# EAGLE board N2-mapleCUx_large_330-014 (EAGLE 7.6.0)
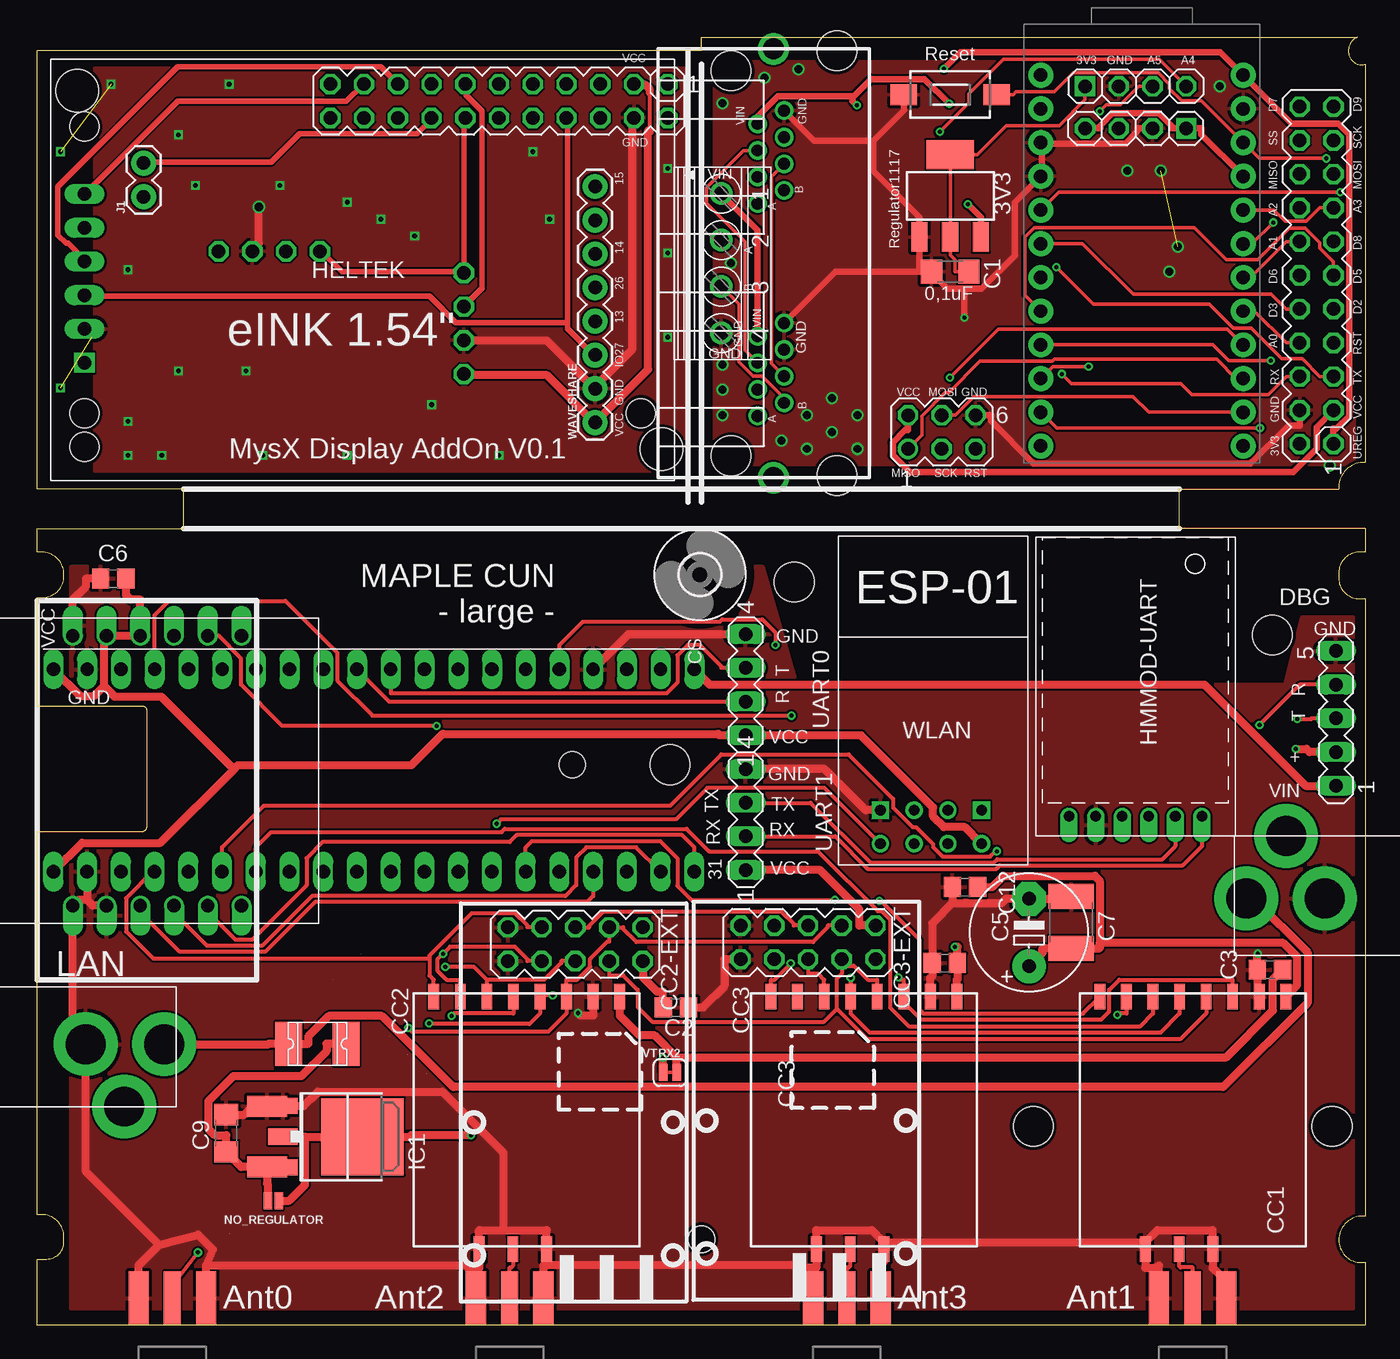
[diagram p0: board, top side]
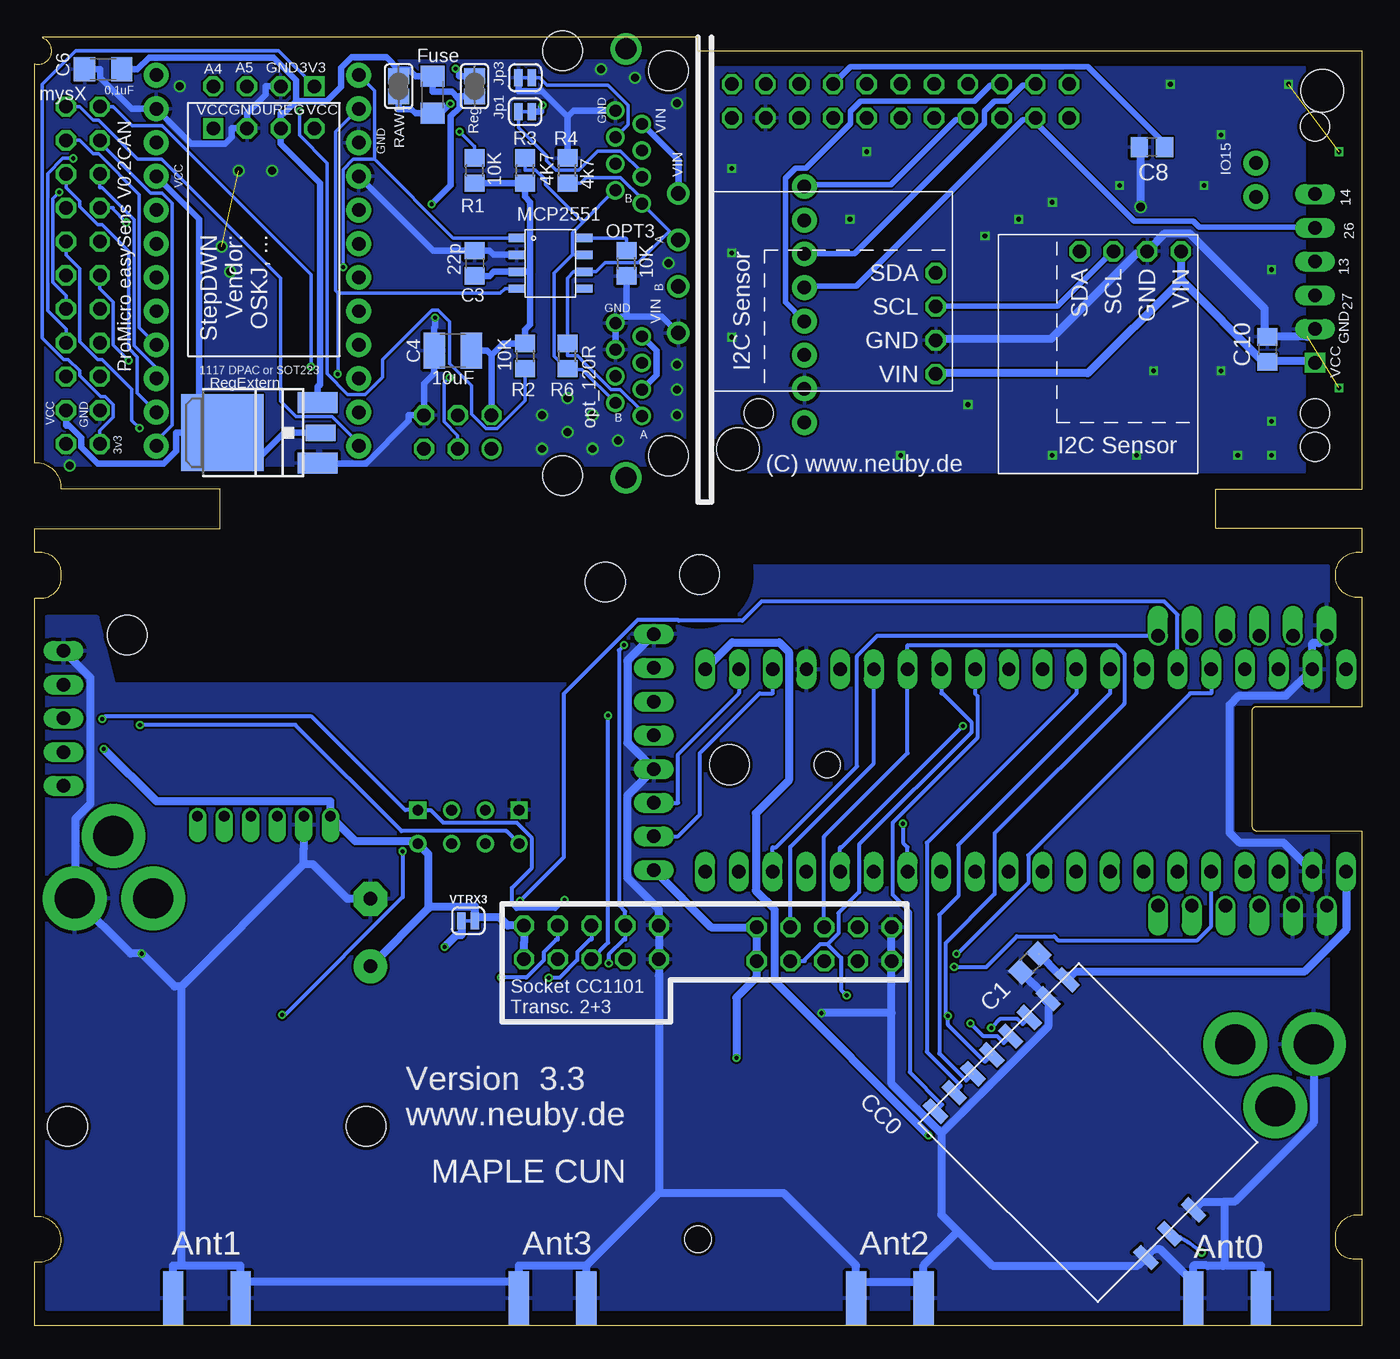
[diagram p1: board, bottom side, seen from below]

Size 100 x 97 mm. Coordinates in mm from the lower left corner, seen from the top.
Outline: 0,0 0,5 0.71,5 arc90 2,6.29 2,6.67 arc90 0.32,8.35 0,8.35 0,37.21 7.89,37.21 arc90 8.26,37.58 8.26,46.32 arc90 7.97,46.61 0,46.61 0,54.83 0.39,54.83 arc90 2,56.44 2,56.57 arc90 0.33,58.24 0,58.24 0,60 11,60 11,63 0,63 0,96 50,96 50,97 99.4,97 arc90 98.8,95.6 arc90 100,95 100,65 99.8,65 arc90 98,63 86,63 86,60 100,60 100,58.24 99.54,58.24 arc90 98,56.7 98,56.41 arc90 99.41,54.75 100,54.75 100,8.24 99.8,8.24 arc90 98,6.44 arc90 99.69,4.75 100,4.75 100,0 0,0
Copper layers (1*16): Top 0.035mm / dielectric 1.5mm / Bottom 0.035mm
Design rules "SeeedStudio_2layer_DRU_no_angle_20140221": minimum track width 6mil, minimum drill 12mil, track to track 6mil, track to pad 6mil, pad to pad 6mil, via to via 6mil, smd to smd 0mil, copper to edge 10mil, drill to drill 10mil, minimum pad ring 10mil, minimum via ring 6mil, stop-mask expansion 2mil, vias tented up to drill 100mil, thermal gap 10mil
Net classes: 0 default: width 0.305 mm; 1 Power: width 0.61 mm
Holes 2 mm at 50,6.5 40.28,42.23
Holes 3 mm at 47.65,42.23 93,52 57,56 75,15 97.5,15 60.2,64 60.2,96
Holes 3.2 mm at 47,66 3,93
tRestrict: area 0,37.3 to 9.4,46.5; area 0,95 to 50,96; area 0,63 to 1,95; area 100,63.5 to 100.5,96.5; area 61.9,63.2 to 94.9,63.7
bRestrict: area 0,37.3 to 9.4,46.5; area 0,95 to 50,96; area 0,63 to 1,95; area 100,63.5 to 100.5,96.5; area 62,63.2 to 95,63.7

## Footprints (pad centres in the part's own frame; a part is rotated, then mirrored left to right if it is on the bottom)
SPARKFUN_PRO_MICRO = drill 1.016 pad 1.88: 1 -7.62,12.7; 2 -7.62,10.16; 3 -7.62,7.62; 4 -7.62,5.08; 5 -7.62,2.54; 6 -7.62,0; 7 -7.62,-2.54; 8 -7.62,-5.08; 9 -7.62,-7.62; 10 -7.62,-10.16; 11 -7.62,-12.7; 12 -7.62,-15.24; 13 7.62,-15.24; 14 7.62,-12.7; 15 7.62,-10.16; 16 7.62,-7.62; 17 7.62,-5.08; 18 7.62,-2.54; 19 7.62,0; 20 7.62,2.54; 21 7.62,5.08; 22 7.62,7.62; 23 7.62,10.16; 24 7.62,12.7
C0805 = smd 1.3 x 1.5: 1 -0.95,0; 2 0.95,0
E5-8,5 = drill 1.016 pad 2.54: + -2.54,0 | drill 1.016 pad 2.54 octagon: - 2.54,0
C1812 = smd 1.9 x 3.4: 1 -1.95,0; 2 1.95,0
C1206 = smd 1.6 x 1.8: 1 -1.4,0; 2 1.4,0
C1210 = smd 1.6 x 2.7: 1 -1.4,0; 2 1.4,0
CC1101_MODULE1_SMD = smd 1.93 x 0.813: ANT 19,5.96; CSN 0,0; GDO0 0,2; GDO2 0,4; GND@0 0,12; GND@1 19,8.5; GND@2 19,3.42; MISO 0,6; MOSI 0,10; SCLK 0,8; VCC 0,14
CC1101_MODULE3_DIL = drill 1.016 octagon: CSN 1.81,6.1; GDO0 4.35,6.1; GDO2 4.35,8.64; GND@0 1.81,3.56; GND@1 4.35,3.56; MISO 1.81,8.64; MOSI 1.81,11.18; SCK 4.35,11.18; VCC@0 1.81,13.72; VCC@1 4.35,13.72
MA05-1 = drill 1.016 long: 1 -5.08,0; 2 -2.54,0; 3 0,0; 4 2.54,0; 5 5.08,0
1812L = smd 2.03 x 3.3: P$1 -2.16,0; P$2 2.16,0
1206 = smd 1.6 x 1.8: 1 -1.4,0; 2 1.4,0
DTSM-3 = smd 2 x 1.6: 1 -3.494,0; 2 3.494,0
3,0 = hole 3: 0,0
HELTEC_1.54INCH = drill 1.016 long: CLK 21.59,-7.62; CS 21.59,-5.08; D/C 21.59,0; GND 21.59,2.54; SDI 21.59,-2.54 | drill 1.016 square: VCC 21.59,5.08 | hole 2.2: 21.59,11.43; 21.59,8.89; 21.59,-12.7; -20.32,8.89
HM-MOD-UART-DIL = drill 0.8 offset: 1 0,12; 2 0,10; 3 0,8; 4 0,6; 5 0,4; 6 0,2
1X04-S = drill 1.016 square: 1 -3.81,0 | drill 1.016 octagon: 2 -1.27,0; 3 1.27,0; 4 3.81,0
DPACK = smd 1.6 x 3: 1 -2.28,-4.8; 3 2.28,-4.8 | smd 5.8 x 6.2: 4 0,2.38
USR-ES1 = drill 1 pad 1.35 offset: 1 -10.16,5.715; 2 -10.16,3.175; 3 -10.16,0.635; 4 -10.16,-1.905; 5 -10.16,-4.445; 6 -10.16,-6.985; 7 10.16,-6.985; 8 10.16,-4.445; 9 10.16,-1.905; 10 10.16,0.635; 11 10.16,3.175; 12 10.16,5.715
SOT223 = smd 1.219 x 2.235: 1 -2.311,-3.099; 2 0,-3.099; 3 2.311,-3.099 | smd 3.6 x 2.2: TAB 0,3.099
1X02 = drill 1.016 pad 1.88: 1 0,0; 2 2.54,0
RJ45_2X_S = drill 0.889: 1-1 -4.5,2; 1-2 -5.5,4; 1-3 -6.5,2; 1-4 -7.5,4; 1-5 -8.5,2; 1-6 -9.5,4; 1-7 -10.5,2; 1-8 -11.5,4; 2-1 11.5,2; 2-2 10.5,4; 2-3 9.5,2; 2-4 8.5,4; 2-5 7.5,2; 2-6 6.5,4; 2-7 5.5,2; 2-8 4.5,4 | drill 1.575 pad 2.184: G1 -16.15,3.2; G3 16.15,3.2 | hole 3: -14.5,0; 14.5,0
SMT-JUMPER_2_NC_TRACE_SILK = smd 0.635 x 1.27: 1 -0.508,0; 2 0.508,0
MA11-2 = drill 1.016 octagon: 1 -12.7,-1.27; 2 -12.7,1.27; 3 -10.16,-1.27; 4 -10.16,1.27; 5 -7.62,-1.27; 6 -7.62,1.27; 7 -5.08,-1.27; 8 -5.08,1.27; 9 -2.54,-1.27; 10 -2.54,1.27; 11 0,-1.27; 12 0,1.27; 13 2.54,-1.27; 14 2.54,1.27; 15 5.08,-1.27; 16 5.08,1.27; 17 7.62,-1.27; 18 7.62,1.27; 19 10.16,-1.27; 20 10.16,1.27; 21 12.7,-1.27; 22 12.7,1.27
SMT-JUMPER_2_NC_PASTE_NO-SILK = smd 0.635 x 1.27: 1 -0.406,0; 2 0.406,0
R0805 = smd 1.3 x 1.5: 1 -0.95,0; 2 0.95,0
SJ = smd 1.168 x 1.6: 1 -0.762,0; 2 0.762,0
MA03-2 = drill 1.016: 1 -2.54,-1.27 | drill 1.016 octagon: 2 -2.54,1.27; 3 0,-1.27; 4 0,1.27; 5 2.54,-1.27; 6 2.54,1.27
20-DIP = drill 1.016 pad 1.27 long: 1 -24.13,-7.62; 2 -21.59,-7.62; 3 -19.05,-7.62; 4 -16.51,-7.62; 5 -13.97,-7.62; 6 -11.43,-7.62; 7 -8.89,-7.62; 8 -6.35,-7.62; 9 -3.81,-7.62; 10 -1.27,-7.62; 11 1.27,-7.62; 12 3.81,-7.62; 13 6.35,-7.62; 14 8.89,-7.62; 15 11.43,-7.62; 16 13.97,-7.62; 17 16.51,-7.62; 18 19.05,-7.62; 19 21.59,-7.62; 20 24.13,-7.62 | drill 1 pad 1.27 long: 21 24.13,7.62; 22 21.59,7.62; 23 19.05,7.62; 24 16.51,7.62; 25 13.97,7.62; 26 11.43,7.62; 27 8.89,7.62; 28 6.35,7.62; 29 3.81,7.62; 30 1.27,7.62; 31 -1.27,7.62; 32 -3.81,7.62; 33 -6.35,7.62; 34 -8.89,7.62; 35 -11.43,7.62; 36 -13.97,7.62; 37 -16.51,7.62; 38 -19.05,7.62; 39 -21.59,7.62; 40 -24.13,7.62
PJ-102A = drill 3 pad 4.8: RING 0.1,-3.39; RING_SW -4.6,-6.29; TIP 0.1,-9.29
I2C_BREAKOUT = drill 1.016 octagon: GND -3.81,-8.89; SCL -1.27,-8.89; SDA 1.27,-8.89; VIN -6.35,-8.89
SOIC-8 = smd 1.27 x 0.635: CANH 2.54,0.635; CANL 2.54,-0.635; RS 2.54,1.905; RXD -2.54,-1.905; TXD -2.54,1.905; VDD -2.54,-0.635; VREF 2.54,-1.905; VSS -2.54,0.635
MA04-1 = drill 1.016 long: 1 -3.81,0; 2 -1.27,0; 3 1.27,0; 4 3.81,0
1X08 = drill 1.016 pad 1.88: 1 0,0; 2 2.54,0; 3 5.08,0; 4 7.62,0; 5 10.16,0; 6 12.7,0; 7 15.24,0; 8 17.78,0
ESP01 = drill 0.8: CH_PD -1.285,-8.178; GPIO0 1.255,-5.638; GPIO2 -1.285,-5.638; RST 1.255,-8.178; TX -3.825,-8.178; VCC 3.795,-8.178 | drill 0.8 square: GND -3.825,-5.638; RX 3.795,-5.638
SMA_EDGELAUNCH = smd 4.064 x 1.524: GND@1 2.032,-2.54; GND@2 2.032,2.54 | smd 4.064 x 1.524 bottom: GND@3 2.032,2.54; GND@4 2.032,-2.54 | smd 4.064 x 1.27: P 2.032,0
1751264 = drill 1.1 pad 1.7: 1 -5.25,-0.1; 2 -1.75,-0.1; 3 1.75,-0.1; 4 5.25,-0.1

## Placement (x,y rotation side)
B1  SPARKFUN_PRO_MICRO  [SPARKFUN_PRO_MICRO]  83.18,81.47 0 top
C1  22pF  [C0805]  25.02,27.3 45 bottom
C2  22pF  [C0805]  48.08,23.95 180 top
C3  22pF  [C0805]  92.82,26.8 0 top
C4  22pF  [C0805]  68.33,27.3 0 top
C5  220uF  [E5-8,5]  74.68,29.59 90 top
C6  22pF  [C0805]  5.71,56.24 180 top
C7  [C1812]  77.85,30.35 270 top
C8  2u2  [C0805]  15.82,88.74 180 bottom
C9  0.1uF  [C1206]  14.22,14.48 90 top
C10  22u  [C0805]  7.13,73.51 90 bottom
C11  22p  [C0805]  66.83,79.99 270 bottom
C12  22pF  [C0805]  69.85,33.02 180 top
C13  10uF  [C1210]  68.47,73.42 180 bottom
C14  0.1uF  [C1206]  94.81,94.61 180 bottom
C15  0.1uF  [C1206]  68.74,79.36 0 top
CC0  CC1101  [CC1101_MODULE1_SMD]  32.13,16.13 315 bottom
CC1  CC1101_MODULE1SMD  [CC1101_MODULE1_SMD]  80.01,24.77 270 top
CC2  CC1101_MODULE1SMD  [CC1101_MODULE1_SMD]  29.84,24.77 270 top
CC2-EXT  CC1101_MODULE3_DIL  [CC1101_MODULE3_DIL]  31.87,31.79 270 top
CC3  CC1101_MODULE1SMD  [CC1101_MODULE1_SMD]  55.24,24.77 270 top
CC3-EXT  CC1101_MODULE3_DIL  [CC1101_MODULE3_DIL]  49.4,31.93 270 top
DBG  [MA05-1]  97.79,45.72 90 top
F1  1812L  [1812L]  21.08,21.21 180 top
F2  6V/0.75A  [1206]  70.01,92.69 270 bottom
FLASH  DTSM-3  [DTSM-3]  68.74,92.69 0 top
H6  MOUNT-HOLE3.0  [3,0]  49.89,56.55 0 top
HELTEK  HELTEC_1.54STANDARD1  [HELTEC_1.54INCH]  25.13,77.59 180 top
HMMOD-UART  HM-MOD-UARTDIL  [HM-MOD-UART-DIL]  89.69,38.35 90 top
I2C  [1X04-S]  82.71,93.33 0 top
IC1  LD117ADT50TR  [DPACK]  22.1,14.22 270 top
IC2  LAN-USR-ES1  [USR-ES1]  8.38,41.78 90 top
IC3  LD117ADT50TR  [DPACK]  83.46,67.23 90 bottom
IC4  LM1117MPX-ADJ  [SOT223]  81.53,67.23 90 bottom
IC5  LM1117MPX-ADJ  [SOT223]  68.74,85.07 0 top
IC6  LM1117MPX-ADJ  [SOT223]  21.59,14.22 270 top
J1  [1X02]  8,85 90 top
J4  [RJ45_2X_S]  52.23,79.99 270 top
JP1  JUMPER-SMT_2_NC_TRACE_SILK  [SMT-JUMPER_2_NC_TRACE_SILK]  63.02,91.42 0 bottom
JP3  JUMPER-SMT_2_NC_TRACE_SILK  [SMT-JUMPER_2_NC_TRACE_SILK]  63.02,93.96 180 bottom
MYSX  [MA11-2]  34.76,92.21 180 top
NO_REGULATOR  JUMPER-SMT_2_NC_PASTE_NO-SILK  [SMT-JUMPER_2_NC_PASTE_NO-SILK]  17.78,9.4 180 top
OPT3  10K  [R0805]  55.41,79.99 90 bottom
R1  10K  [R0805]  66.83,86.97 90 bottom
R2  10K  [R0805]  63.02,73 270 bottom
R3  4K7  [R0805]  63.02,86.97 90 bottom
R4  4k7  [R0805]  59.85,86.97 90 bottom
R6  120R  [R0805]  59.85,73 90 bottom
RAW1  [SJ]  72.55,93.33 90 bottom
REG_BRIDGE  [SJ]  66.83,93.33 90 bottom
STEPDWN  [1X04-S]  82.71,90.15 180 top
SV1  [MA03-2]  68.11,67.29 0 top
SV2  [MA11-2]  96.33,79.08 90 top
U$1  MAPLEMINI  [20-DIP]  25.34,41.8 0 top
U$2  2.1MMJACKTHM  [PJ-102A]  0.25,21.08 90 top
U$3  2.1MMJACKTHM  [PJ-102A]  100.33,32.26 270 top
U$4  I2C-BREAKOUT  [I2C_BREAKOUT]  20,72 180 bottom
U$5  I2C-BREAKOUT  [I2C_BREAKOUT]  41,78 90 bottom
U$6  MCP2551  [SOIC-8]  61.12,79.99 0 bottom
UART0  [MA04-1]  53.34,48.26 90 top
UART1  [MA04-1]  53.34,38.1 90 top
VTRX2  JUMPER-SMT_2_NC_TRACE_SILK  [SMT-JUMPER_2_NC_TRACE_SILK]  47.62,19.05 0 top
VTRX3  JUMPER-SMT_2_NC_TRACE_SILK  [SMT-JUMPER_2_NC_TRACE_SILK]  67.31,30.48 180 bottom
WAVESHARE  [1X08]  42,68 90 top
WLAN  ESP01  [ESP01]  67.31,44.45 0 top
X1  [SMA_EDGELAUNCH]  87,0 90 top
X2  [SMA_EDGELAUNCH]  35.56,0 90 top
X3  [SMA_EDGELAUNCH]  60.96,0 90 top
X4  1751264  [1751264]  51.59,79.99 270 top
X5  [SMA_EDGELAUNCH]  10.16,0 90 top

## Library data of the parts
B1 = SparkFun-Boards
C1-C7 C9 C11-C15 OPT3 R1-R4 R6 = rcl
C8 C10 = rcl@1; SPICEPREFIX: C
CC0 CC1 CC2 CC2-EXT CC3 CC3-EXT HMMOD-UART = wireless
DBG SV1 UART0 UART1 = con-lstb; OC_FARNELL: unknown; OC_NEWARK: unknown
F1 = ptc-littlefuse
F2 = SparkFun-Fuses; PROD_ID: RES-11150
FLASH = mechanics
H6 = holes
HELTEK = display_v2
I2C STEPDWN = pinhead-2
IC1 IC3 = v-reg
IC2 = Martin-Communication
IC4-IC6 = lm1117
J1 = SparkFun-Connectors
J4 = RJ45
JP1 JP3 NO_REGULATOR VTRX2 VTRX3 = SparkFun-Jumpers
MYSX SV2 = con-Pinheader; OC_FARNELL: unknown; OC_NEWARK: unknown
RAW1 REG_BRIDGE = jumper
U$1 = maplemini-small
U$2 U$3 X1-X3 X5 = adafruit
U$4 U$5 = i2c
U$6 = MCP2551
WAVESHARE = SparkFun-Connectors; PROD_ID: CONN-08438
WLAN = esp8266modules
X4 = con-phoenix-350; MPN: 1751264; OC_FARNELL: unknown; OC_NEWARK: 10R0934

## Nets
1: J4.1-3 JP1.1
2: J4.1-6 JP3.1
3V1: C15.2 I2C.1 IC5.2 IC5.TAB SV2.2
3V3: MYSX.2
A: J4.1-1 J4.2-1 R4.1 R6.2 U$6.CANL X4.2
A0: B1.17 SV2.8
A1: B1.18 SV2.14
A2: B1.19 SV2.16
A3: B1.20 SV2.15
A4: I2C.4 R1.2
A5: I2C.3 R2.2
ANT0: CC0.ANT X5.P
ANT1: CC1.ANT X1.P
ANT2: CC2.ANT X2.P
ANT3: CC3.ANT X3.P
B: J4.1-2 J4.2-2 R3.2 R6.1 U$6.CANH X4.3
CANH: J4.1-4 J4.2-4
CANL: J4.1-5 J4.2-5
CC_CS0: CC0.CSN U$1.29
CC_CS1: CC1.CSN U$1.35
CC_CS2: CC2-EXT.CSN CC2.CSN U$1.4
CC_CS3: CC3-EXT.CSN CC3.CSN U$1.25
CC_IN_0: CC0.GDO2 U$1.33
CC_IN_1: CC1.GDO2 U$1.7
CC_IN_2: CC2-EXT.GDO2 CC2.GDO2 U$1.5
CC_IN_3: CC3-EXT.GDO2 CC3.GDO2 U$1.37
CC_OUT_0: CC0.GDO0 U$1.32
CC_OUT_1: CC1.GDO0 U$1.6
CC_OUT_2: CC2-EXT.GDO0 CC2.GDO0 U$1.36
CC_OUT_3: CC3.GDO0
D2: B1.5 SV2.9
D3: B1.6 SV2.10
D4: B1.7
D5: B1.8 SV2.11
D6: B1.9 SV2.12
D7: B1.10 SV2.22
D8: B1.11 SV2.13
D9: B1.12 SV2.21
D10_SS: B1.13 SV2.20
D11_MOSI: B1.14 SV1.4 SV2.17
D12_MISO: B1.15 SV1.1 SV2.18
D13_SCK: B1.16 SV1.3 SV2.19
EN: C8.1 MYSX.7
FREE: J1.1
GND [Power]: C1.1 C2.1 C3.1 C4.1 C5.- C6.2 C7.1 C9.2 C12.2 CC0.GND@0 CC0.GND@1 CC0.GND@2 CC1.GND@0 CC1.GND@1 CC1.GND@2 CC2-EXT.GND@0 CC2-EXT.GND@1 CC2.GND@0 CC2.GND@1 CC2.GND@2 CC3-EXT.GND@0 CC3-EXT.GND@1 CC3.GND@0 CC3.GND@1 CC3.GND@2 DBG.5 HMMOD-UART.2 IC1.1 IC2.1 IC2.2 IC2.12 IC6.1 U$1.2 U$1.24 U$1.39 U$2.RING U$3.RING UART0.4 UART1.4 WLAN.GND X1.GND@1 X1.GND@2 X1.GND@3 X1.GND@4 X2.GND@1 X2.GND@2 X2.GND@3 X2.GND@4 X3.GND@1 X3.GND@2 X3.GND@3 X3.GND@4 X5.GND@1 X5.GND@2 X5.GND@3 X5.GND@4
GND1 [Power]: C8.2 C10.2 HELTEK.GND MYSX.4 U$4.GND U$5.GND WAVESHARE.2
GND2 [Power]: B1.3 B1.4 B1.23 C11.1 C13.2 C14.2 C15.1 FLASH.1 I2C.2 IC3.1 IC4.1 IC5.1 J4.1-8 J4.2-6 J4.2-8 JP3.2 OPT3.1 R4.2 STEPDWN.2 SV1.6 SV2.4 U$6.VSS X4.4
IN [Power]: C9.1 F1.P$1 IC1.3 IC6.3 NO_REGULATOR.2
IN1 [Power]: F2.2 J4.1-7 J4.2-3 J4.2-7 JP1.2 RAW1.1 X4.1
IO0: MYSX.9
IO2: MYSX.10
IO4: MYSX.11
IO12: MYSX.18
IO13: HELTEK.SDI MYSX.17 WAVESHARE.4
IO14: HELTEK.CLK MYSX.19 WAVESHARE.6
IO15: J1.2 MYSX.16 WAVESHARE.8
IO21: MYSX.14 U$4.SDA U$5.SDA
IO22: MYSX.13 U$4.SCL U$5.SCL
IO25: MYSX.12
IO26: HELTEK.CS MYSX.20 WAVESHARE.5
IO27: HELTEK.D/C MYSX.8 WAVESHARE.3
IO34: MYSX.21
IO35: MYSX.22
MISO1: CC0.MISO CC1.MISO CC2-EXT.MISO CC2.MISO CC3-EXT.MISO CC3.MISO U$1.27
MISO2: IC2.7 U$1.18
MOSI1: CC0.MOSI CC1.MOSI CC2-EXT.MOSI CC2.MOSI CC3-EXT.MOSI CC3.MOSI U$1.26
N$1 [Power]: C3.2 CC2.VCC VTRX2.2
N$3 [Power]: C4.2 CC3.VCC VTRX3.2
N$10: U$6.VREF
N$33: IC2.6
NRESET: U$1.34
RESET: B1.22 FLASH.2 SV2.7
RS: OPT3.2 U$6.RS
RST: IC2.3 U$1.17
RST1: SV1.5
RX0: B1.2 SV2.6 U$6.RXD
RX1: HMMOD-UART.5 U$1.22 UART1.3
RX-MAPLE: U$1.30 UART0.3
RX_DBG: DBG.4 U$1.14 WLAN.TX
RXD0: MYSX.6
SCK1: CC0.SCLK CC1.SCLK CC2-EXT.SCK CC2.SCLK CC3-EXT.SCK CC3.SCLK U$1.28
SCK2: IC2.4 U$1.19
SENSOR_VN: MYSX.15
SWCLK/TCK: U$1.10
SWDIO/TMS: U$1.11
SWO/TDO: U$1.8
TDI: U$1.9
TX1: HMMOD-UART.6 U$1.23 UART1.2
TX2: B1.1 SV2.5 U$6.TXD
TX-MAPLE: U$1.31 UART0.2
TX_DBG: DBG.3 U$1.15 WLAN.RX
TXD0: MYSX.5
UIN [Power]: C14.1 F2.1 IC3.3 IC4.3 IC5.3 RAW1.2 REG_BRIDGE.1 STEPDWN.3
UREG [Power]: MYSX.1
UREG1 [Power]: B1.24 REG_BRIDGE.2 SV2.1
VCC [Power]: C1.2 C2.2 C5.+ C6.1 C7.2 C12.1 CC0.VCC CC1.VCC CC2-EXT.VCC@0 CC2-EXT.VCC@1 CC3-EXT.VCC@0 CC3-EXT.VCC@1 DBG.2 HMMOD-UART.1 IC2.10 IC2.11 U$1.1 U$1.40 UART0.1 UART1.1 VTRX2.1 VTRX3.1 WLAN.VCC
VCC1 [Power]: C10.1 HELTEK.VCC MYSX.3 U$4.VIN U$5.VIN WAVESHARE.1
VCC2 [Power]: B1.21 C11.2 C13.1 IC3.4 IC4.2 IC4.TAB R1.1 R2.1 R3.1 STEPDWN.1 STEPDWN.4 SV1.2 SV2.3 U$6.VDD
VIN [Power]: F1.P$2 U$2.TIP U$3.TIP
VIN2 [Power]: DBG.1 IC1.4 IC6.2 IC6.TAB NO_REGULATOR.1 U$1.21
WIZ_CS: IC2.5 U$1.20
WIZ_RST: IC2.8 U$1.16

## Tracks (layer width: path | path; a pad name or v marks a point on that pad's centre or on a via)
1
  Bottom 0.254: JP1.1 63.53,90.2 61.42,88.09 61.42,87.74 60.71,87.02 58.99,87.02 57.57,88.44 55.83,88.44 54.23,86.84 J4.1-3
2
  Bottom 0.254: JP3.1 61.95,93.96 61.37,93.39 56.78,93.39 55.27,91.88 55.27,90.45 J4.1-6
3V1
  Top 0.254: 69.22,88.17 68.74,87.69 IC5.2 68.74,80.6 69.09,80.25 69.09,79.36 C15.2 | 69.22,88.17 70.79,88.17 72.98,90.36 76.95,90.36 78.9,92.31 I2C.1 | IC5.TAB 69.22,88.17
  Bottom 0.254: SV2.2 95.06,67.4 94.04,68.42 94.04,69.34 94.64,69.94 94.97,69.94 96.58,71.55 96.58,71.89 97.43,72.73 97.77,72.73 99.38,74.35 99.38,93.5 96.88,96 81.58,96 I2C.1
A
  Bottom 0.254: 52.17,82.41 54.23,84.47 J4.1-1 54.23,84.84 55.83,86.44 58.43,86.44 58.85,86.03 R4.1 | X4.2 52.17,82.41 | 52.17,82.41 54.55,80.04 57.01,80.04 57.69,79.36 U$6.CANL 59.37,79.36 59.85,78.88 59.85,74.86 R6.2 59.85,73.05 59.09,73.05 58.82,72.78 58.82,72.73 56.58,70.49 55.88,70.49 54.23,68.84 J4.2-1
A0
  Top 0.254: SV2.8 94.04,74 91.66,76.39 B1.17
A1
  Top 0.254: SV2.14 94.04,81.62 91.35,78.93 B1.18
A2  (via drill 0.3 pad 0.61)
  Top 0.254: v93.06,83.07 91.46,81.47 B1.19
  Bottom 0.254: v93.06,83.07 94.04,84.05 94.04,84.17 SV2.16
A3
  Top 0.254: B1.20 93.12,84.01 93.98,83.15 95.57,83.15 96.58,84.17 SV2.15
A4  (via drill 0.3 pad 0.61)
  Top 0.254: v67.95,89.89 70.14,92.07 70.14,92.75 72.75,95.37 84.48,95.37 I2C.4
  Bottom 0.254: R1.2 66.83,88.83 66.89,88.83 v67.95,89.89
A5  (via drill 0.3 pad 0.61)
  Top 0.254: v80.02,91.45 80.49,91.92 81.56,91.92 82.96,93.33 I2C.3
  Bottom 0.254: v80.02,91.45 80.02,89.62 77.94,87.54 77.94,71.67 76.39,70.11 75.06,70.11 73.76,71.42 73.76,72.74 70.03,76.48 69.57,76.48 68.7,75.61 68.7,72.43 67.07,70.8 67.07,68.62 65.99,67.54 65.14,67.54 63.02,69.66 R2.2
ANT0  (via drill 0.3 pad 0.61)  (1 unrouted)
  Top 0.305: X5.P 10.16,3.35 10.45,3.35 v12.09,5.5
  Bottom 0.305: CC0.ANT 13.72,6.65 13.08,6.26 v12.09,5.5
ANT1
  Top 0.305: X1.P 87,4.37 86.1,4.37 85.97,4.5 CC1.ANT
ANT2
  Top 0.305: X2.P 35.56,4.37 35.68,4.37 35.8,4.5 CC2.ANT
ANT3
  Top 0.305: X3.P 60.96,4.37 61.08,4.37 61.2,4.5 CC3.ANT
B
  Top 0.254: X4.3 52.82,76.91 52.82,72.55 53.88,71.49 54.58,71.49 56.23,69.84 J4.2-2
  Bottom 0.254: J4.2-2 58.74,72 59.85,72 | 58.69,83.1 56.3,85.49 J4.1-2 | 59.47,80.62 59.47,82.32 58.69,83.1 | 58.69,83.1 61.51,85.92 61.51,86.27 62.26,87.02 63.02,87.02 R3.2 | 59.47,80.62 59.37,80.62 U$6.CANH | 59.85,72 60.86,73.01 60.86,79.24 59.47,80.62 | R6.1 59.85,72
CANH
  Top 0.254: J4.2-4 55.27,72.45 55.27,86.53 J4.1-4
CANL
  Top 0.254: J4.2-5 53.28,73.44 53.28,81.63 50.39,84.52 50.39,85.7 53.18,88.49 J4.1-5
CC_CS0
  Bottom 0.305: U$1.29 29.15,47.61 28.97,47.43 28.97,44.25 35.36,37.86 35.36,32.45 34.06,31.15 34.06,19.07 31.63,16.63 CC0.CSN
CC_CS1  (via drill 0.3 pad 0.61)
  Top 0.305: v63.41,31.98 63.53,31.98 66.41,29.09 66.41,23.8 66.71,23.5 78.74,23.5 CC1.CSN
  Bottom 0.305: U$1.35 13.91,53.54 14.9,54.54 45.21,54.54 46.67,53.07 51.46,53.07 51.53,53.15 54.55,53.15 60.12,47.57 60.12,35.26 v63.41,31.98
CC_CS2
  Top 0.305: 29.52,27.63 29.52,27.87 32.7,31.05 35.97,31.05 36.9,30.11 36.9,29.98 CC2-EXT.CSN | CC2.CSN 29.84,26.04 29.52,26.36 29.52,27.63 | U$1.4 8.69,34.18 6.68,32.17 6.68,29.68 8.73,27.63 29.52,27.63
CC_CS3  (via drill 0.3 pad 0.61)
  Top 0.305: U$1.25 39.31,51.23 41.09,53.01 51.4,53.01 51.56,53.17 54.6,53.17 55.57,52.2 v55.57,51.24 | CC3.CSN 55.24,26.04 55.51,26.04 v56.73,27.25
  Bottom 0.305: v56.73,27.25 56.73,27.95 55.63,29.05 55.49,29.05 CC3-EXT.CSN 55.49,31.18 55.97,31.66 55.97,50.84 v55.57,51.24
CC_IN_0  (1 unrouted)
  Bottom 0.305: CC0.GDO2 29.8,18.45 31.84,20.49 31.84,30.92 30.42,32.35 30.42,36.18 18.99,47.61 U$1.33
CC_IN_1
  Top 0.305: CC1.GDO2 84.01,23.5 83.04,22.53 65.62,22.53 64.2,23.95 64.2,30.57 63.55,31.22 63.28,31.22 58.78,35.72 50.58,35.72 48.9,37.4 35.19,37.4 34.96,37.16 17.6,37.16 16.45,36.01 U$1.7
CC_IN_2  (via drill 0.3 pad 0.61)
  Top 0.305: 33.84,26.04 32.88,27 v30.72,27 | CC2-EXT.GDO2 39.44,27.44 39.44,27.31 38.17,26.04 33.84,26.04 | CC2.GDO2 33.84,26.04
  Bottom 0.305: v30.72,27 28.3,27 26,29.3 23.18,29.3 22.9,29.02 12.41,29.02 11.37,30.06 U$1.5
CC_IN_3  (via drill 0.3 pad 0.61)
  Top 0.305: CC3-EXT.GDO2 58.03,26.51 58.77,26.51 59.24,26.04 CC3.GDO2 | U$1.37 8.83,53.49 9.9,54.56 18.69,54.56 22.59,50.67 22.59,48.58 25.24,45.92 v56.77,45.92
  Bottom 0.305: CC3-EXT.GDO2 56.77,28.84 v56.77,45.92
CC_OUT_0  (1 unrouted)
  Bottom 0.305: CC0.GDO0 30.21,18.05 32.77,20.61 32.77,36.36 21.53,47.61 U$1.32
CC_OUT_1  (via drill 0.3 pad 0.61)
  Top 0.305: v81.33,23.39 81.43,23.5 82.01,23.5 CC1.GDO0 | U$1.6 13.91,36.01 17.06,39.16 47.67,39.16 51.51,43 61.09,43 64.44,39.65 64.44,39 65.91,37.54 66.18,37.54 67.45,36.26 67.45,36.02 68.16,35.31 71.74,35.31 72.14,35.72 v72.25,35.72
  Bottom 0.305: v72.25,35.72 72.25,32.26 81.12,23.39 v81.33,23.39
CC_OUT_2  (via drill 0.3 pad 0.61)
  Top 0.305: CC2-EXT.GDO0 36.9,27.44 36.9,27.57 35.96,28.52 31.07,28.52 v30.55,27.99 30.11,27.55 30.11,26.75 30.82,26.04 31.84,26.04 CC2.GDO0
  Bottom 0.305: U$1.36 11.37,47.61 12.94,47.61 25.13,35.41 25.13,33.32 30.46,27.99 v30.55,27.99
D2  (via drill 0.3 pad 0.61)
  Top 0.254: B1.5 76.91,85.36 v98.11,85.36
  Bottom 0.254: v98.11,85.36 98.62,84.84 98.62,78.58 97.6,77.56 SV2.9
D3
  Top 0.254: SV2.10 94.04,76.55 92.93,77.66 82.52,77.66 78.71,81.47 B1.6
D5
  Top 0.254: SV2.11 97.6,80.1 96.58,81.12 96.58,81.54 95.48,82.65 94.29,82.65 91.91,80.27 89.53,80.27 87.14,82.66 75.06,82.66 74.37,81.97 74.37,77.58 B1.8
D6  (via drill 0.3 pad 0.61)
  Top 0.254: v92.87,72.65 89.73,72.65 88.53,73.85 B1.9
  Bottom 0.254: SV2.12 95.06,78.07 94.04,77.05 94.04,73.83 v92.87,72.65
D7  (via drill 0.3 pad 0.61)
  Top 0.254: v79.16,72.2 79.13,72.23 76.48,72.23 B1.10
  Bottom 0.254: SV2.22 94.04,91.78 92.62,90.36 90.38,90.36 79.16,79.15 v79.16,72.2
D8  (via drill 0.3 pad 0.61)
  Top 0.254: v92.07,67.57 76.76,67.57 B1.11
  Bottom 0.254: v92.07,67.57 92.66,68.16 92.66,70.5 94.89,72.73 95.23,72.73 96.58,74.09 96.58,79.59 97.6,80.61 SV2.13
D9
  Bottom 0.254: SV2.21 96.58,91.78 95.57,90.77 95.14,90.77 92.19,87.82 90.38,87.82 81.45,78.89 81.45,69.63 80.27,68.45 77.57,68.45 75.56,66.45 B1.12
D10_SS
  Bottom 0.254: SV2.20 95.06,89.12 91.22,85.28 90.38,85.28 89.61,84.51 89.61,67.8 90.8,66.6 B1.13
D11_MOSI
  Top 0.254: B1.14 83.69,68.77 82.5,69.96 70.53,69.96 69.12,68.56 SV1.4
  Bottom 0.254: B1.14 92.25,70.22 92.25,72.94 92.9,73.59 92.9,80.91 94.88,82.89 95.22,82.89 96.58,84.25 96.58,84.67 97.6,85.69 SV2.17
D12_MISO
  Top 0.254: B1.15 90.26,71.31 88.81,72.76 76.6,72.76 76.45,72.61 70.99,72.61 68.64,70.26 68.36,70.26 66.6,68.5 66.6,67.05 SV1.1
  Bottom 0.254: B1.15 90.8,72.13 92.47,73.8 92.47,83.27 94.89,85.69 95.06,85.69 SV2.18
D13_SCK  (via drill 0.3 pad 0.61)
  Top 0.254: B1.16 89.6,75.05 72.37,75.05 v68.72,71.4
  Bottom 0.254: v68.72,71.4 69.12,71 69.12,68.05 68.11,67.04 SV1.3 | SV2.19 96.58,89.25 95.57,88.23 95.14,88.23 92.09,85.17 92.09,75.14 B1.16
EN
  Bottom 0.406: C8.1 15,88.83 15,89.14 20.65,94.79 38.54,94.79 39.76,93.57 MYSX.7
GND  (via drill 0.3 pad 0.61)
  Top 0.61: v91.91,28 91.87,28 C3.1 91.87,25.59 92.01,25.45 CC1.GND@0 | CC2.GND@0 41.84,23.34 40.89,23.34 v40.71,23.52 | 63.74,6.27 83.43,6.27 | X3.GND@4 63.5,4.52 63.74,4.77 CC3.GND@1 63.74,6.27 | 33.02,4.34 33.27,4.34 CC2.GND@2 33.27,7.19 35.08,7.19 | X2.GND@3 33.02,4.34 | 12.7,4.52 32.25,4.52 32.43,4.34 33.02,4.34 | 9.17,6.07 12.1,6.83 13.21,5.72 12.7,4.52 | X5.GND@4 12.7,4.52 | 3.75,32.04 3.08,32.04 IC2.1 2.67,22.16 U$2.RING 3.64,11.6 9.17,6.07 | IC2.2 4.16,31.62 3.75,32.04 | 3.75,32.04 3.75,32.2 U$1.2 | X5.GND@3 7.62,4.52 9.17,6.07 | CC3.GND@0 67.25,26.19 67.38,26.33 C4.1 67.38,30.3 68.9,31.81 | X1.GND@3 84.45,4.52 84.28,4.34 83.43,4.34 CC1.GND@2 83.43,6.27 | 83.43,6.27 84.34,7.19 88.51,7.19 CC1.GND@1 88.51,4.34 89.53,3.32 X1.GND@4 | 58.42,4.34 57.6,4.34 57.42,4.52 38.34,4.52 | 58.42,4.34 58.66,4.34 CC3.GND@2 58.66,7.19 62.83,7.19 63.74,6.27 | X3.GND@3 58.42,4.34 | 38.34,4.52 38.1,4.52 X2.GND@1 | 38.34,4.52 CC2.GND@1 38.34,7.19 | 35.08,7.19 38.34,7.19 | 38.34,7.19 | 35.08,7.19 | 35.08,7.19 35.08,13.02 30.5,17.6 21.13,17.6 20.07,16.54 IC6.1 17.33,16.54 IC1.1 16.21,16.5 15.58,15.88 C9.2 | C2.1 50.13,23.95 51.74,25.55 51.74,27.57 CC3-EXT.GND@1 | WLAN.GND 62.37,38.81 59.28,41.91 UART1.4 | C6.2 3.66,56.24 3.66,55.65 2.67,54.66 IC2.12 | 68.9,31.81 72.63,31.81 72.95,32.13 C5.- 76.4,32.13 76.58,32.3 C7.1 | C12.2 68.9,31.81 | U$1.24 44.5,52.07 UART0.4
  Bottom 0.61: 33.02,3.28 33.02,4.52 30.44,7.1 | X2.GND@3 33.02,3.28 | 38.1,3.28 38.1,4.52 43.56,9.99 52.95,9.99 | X2.GND@1 38.1,3.28 | 38.1,3.28 33.02,3.28 | 52.95,9.99 58.42,4.52 | 52.95,9.99 52.95,26.36 CC3-EXT.GND@1 CC3-EXT.GND@0 52.95,31.33 55.34,33.72 55.34,39.91 UART1.4 55.33,43.9 55.33,50.08 UART0.4 | 30.44,7.1 27.84,4.5 16.89,4.5 CC0.GND@2 15.67,5.72 15.19,5.72 12.7,3.24 | 31.68,14.46 31.68,8.35 30.44,7.1 | U$1.2 5.91,36.34 9.2,36.34 9.96,37.11 9.96,46.73 9.27,47.43 5.74,47.43 U$1.39 3.75,51.38 3.23,51.38 IC2.12 | 88.91,25.54 89.44,25.54 v91.91,28 92.74,28 96.9,32.16 | 88.91,25.54 79.69,34.75 | 88.91,4.52 88.91,25.54 | 96.9,32.16 U$3.RING | DBG.5 95.78,48.79 95.78,39.28 96.9,38.16 96.9,32.16 | 88.91,4.52 84.45,4.52 84.45,3.28 | 88.91,4.52 89.53,4.52 X1.GND@4 | 63.5,3.28 63.5,4.52 58.42,4.52 | X3.GND@4 63.5,3.28 | X1.GND@3 84.45,3.28 | 63.5,3.28 84.45,3.28 | 35.43,23.52 CC2-EXT.GND@1 CC2-EXT.GND@0 | 31.68,14.46 35.43,18.21 35.43,23.52 | 35.43,23.52 v40.71,23.52 | 23.83,24.43 23.63,24.23 23.63,22.51 31.68,14.46 | X3.GND@3 58.42,4.52 | 10.39,4.55 10.46,4.48 11.64,4.48 11.68,4.52 12.7,4.52 12.7,3.24 | 23.83,24.43 23.83,24.77 C1.1 | CC0.GND@0 23.83,24.43 | X5.GND@4 12.7,3.24 | 79.69,34.75 79.02,34.75 76.4,32.13 C5.- | 79.69,34.75 79.69,35.94 HMMOD-UART.2 | 10.39,4.55 10.36,4.52 7.62,4.52 X5.GND@3 | 10.39,9.31 10.39,4.55 | CC0.GND@1 12.07,9.31 10.39,9.31 | U$2.RING 3.64,15.27 9.6,9.31 10.39,9.31
  pour Top: 2.54,57.15 54.61,57.15 57.15,48.26 93.98,48.26 95.25,53.34 99.06,53.34 99.06,1.27 2.54,1.27
  pour Bottom: 2.54,1.27 2.54,57.15 54.61,57.15 57.15,48.26 93.98,48.26 95.25,53.34 99.06,53.34 99.06,1.27
GND1  (via drill 0.35, 0.64)  (2 unrouted)
  Top 0.61: v16.68,84.25 16.68,81.5 16.22,81.04 U$4.GND | U$5.GND 32.12,74.16 38.38,74.16 41.9,70.64 WAVESHARE.2 42.05,70.8 44.8,73.55 44.8,90.82 MYSX.4
  Bottom 0.61: HELTEK.GND 3.69,74.92 4.14,74.46 7.05,74.46 C10.2 7.36,74.62 7.36,76.6 13.01,82.26 14.85,82.26 16.07,81.04 U$4.GND 16.37,80.73 16.98,80.73 23.4,74.31 31.96,74.31 U$5.GND | v16.68,84.25 16.68,88.68 C8.2
  other vias: 6.82,65.54 9.36,65.54 6.82,68.08 6.82,79.51 5.55,93.48 14.44,93.48 18.25,85.86 23.33,84.59 25.87,83.32 28.41,82.05 16.98,65.54 23.33,65.54 34.76,65.54 47.46,74.43 47.46,80.78 37.3,88.4 38.57,83.32 29.68,69.35 15.71,71.89 10.63,71.89 10.63,89.67 11.9,85.86 1.74,88.4 1.74,70.62 47.46,87.13
  pour Top: 4.28,64.27 4.28,94.75 48.73,94.75 48.73,64.27
  pour Bottom: 4.28,64.27 4.28,94.75 48.73,94.75 48.73,64.27
GND2  (via drill 0.3 pad 0.61, 0.6)  (1 unrouted)
  Top 0.508: 66.43,79.36 67.25,79.36 | J4.2-8 60.09,79.36 66.43,79.36 | 66.43,79.36 66.43,80.47 IC5.1 66.43,83.47 62.97,86.93 62.97,89.23 | 69.8,78.07 71.1,78.07 73.61,80.58 73.61,84.6 B1.4 75.64,86.63 75.64,89.01 | 67.25,79.36 68.53,78.07 69.8,78.07 | 69.8,78.07 v69.8,75.92 | C15.1 67.25,79.36 | 75.64,89.01 B1.3 | 75.64,89.01 81.92,89.01 82.84,89.93 82.84,90.15 STEPDWN.2 | 62.97,89.23 65.25,91.51 FLASH.1 | J4.1-8 58.49,89.23 62.97,89.23 | SV1.6 71.79,68.56 71.79,68.13 75.01,64.91 91.34,64.91 94.22,67.78 95.06,67.78 SV2.4
  Bottom 0.508: v69.8,75.92 69.8,75.23 69.88,75.15 C13.2 69.88,72.91 69.88,71.69 70.64,70.92 70.64,69.7 SV1.6 71.79,68.56 71.79,68.13 75.01,64.91 76.93,64.91 76.94,64.92 IC4.1 78.47,64.95 IC3.1 | C14.2 95.03,94.61 95.03,93.98 92.67,91.63 B1.23 88.17,89 85.6,89 85.12,89.48 85.12,90.15 STEPDWN.2 83.98,91.29 82.58,92.69 82.58,93.33 I2C.2 | 59.85,91.04 59.85,88.8 R4.2 | 59.85,91.04 61.76,92.94 63.53,92.94 JP3.2 | J4.1-8 59.4,91.49 59.85,91.04 | U$6.VSS 65.39,80.62 65.7,80.94 C11.1 67.97,80.94 69.95,80.94 B1.4 | 55.41,75.96 55.76,75.96 J4.2-8 J4.2-6 | X4.4 52.71,75.96 55.41,75.96 | 55.41,75.96 55.41,78.01 OPT3.1
  other vias: 54.77,93.96 57.31,94.59 51.59,92.06 52.23,79.99 51.59,72.37 51.59,70.47 51.59,68.56 56.04,66.66 57.95,66.02 61.76,66.02 61.76,68.56 59.85,69.83 57.95,68.56 59.85,67.29 85.25,79.36 85.89,81.26 82.08,86.97 84.61,86.97 89.06,93.33 97.31,64.75
  pour Bottom: 99.22,95.23 99.22,64.75 50.96,64.75 50.96,95.23
  pour Top: 50.96,95.23 99.22,95.23 99.22,64.75 50.96,64.75
IN
  Top 0.61: F1.P$1 21.77,21.21 21.77,20.66 19.88,18.76 14.75,18.76 12.87,16.88 12.87,14.83 13.36,14.34 14.22,14.34 C9.1 15.34,11.96 15.34,11.94 IC1.3 | IC1.3 17.3,10.69 17.37,10.61 NO_REGULATOR.2 | IC6.3 18.46,11.94 IC1.3
IN1  (via drill 0.3 pad 0.61)
  Top 0.508: 61.38,92.47 61.38,92.21 v61.7,91.89 | 61.38,92.47 62.78,93.87 66.8,93.87 v68.66,92.01 | J4.1-7 54.23,91.02 55.78,92.57 61.29,92.57 61.38,92.47 | X4.1 54.23,82.5 J4.2-7
  Bottom 0.508: J4.2-7 53.15,73.41 53.15,71.57 J4.2-3 | JP1.2 61.82,91.42 61.82,91.77 v61.7,91.89 | v68.66,92.01 69.38,91.29 F2.2 71.29,91.29 71.6,91.6 72.55,91.6 RAW1.1 | X4.1 51.49,87.75 J4.1-7
IO13
  Top 0.406: HELTEK.SDI 3.53,80.27 2.31,81.5 2.16,81.5 1.55,82.11 1.55,85.78 10.56,94.79 25.85,94.79 27.07,93.57 MYSX.17
  Bottom 0.406: MYSX.17 27.23,93.42 27.99,93.42 29.21,92.19 37.77,92.19 38.54,91.43 38.54,90.51 41.9,87.15 42.66,87.15 43.43,86.39 43.43,77.06 42.05,75.69 WAVESHARE.4
IO14
  Top 0.406: HELTEK.CLK 3.69,85.32 10.56,92.19 23.25,92.19 24.47,93.42 MYSX.19
  Bottom 0.406: MYSX.19 24.63,93.42 25.54,93.42 26.77,92.19 27.68,92.19 28.45,91.43 28.45,90.51 38.23,80.73 41.9,80.73 WAVESHARE.6
IO15
  Top 0.406: J1.2 8.12,87.61 17.6,87.61 19.74,89.75 28.6,89.75 29.67,90.82 MYSX.16
  Bottom 0.406: MYSX.16 29.82,90.82 30.59,90.82 35.48,85.93 41.9,85.93 WAVESHARE.8
IO21
  Top 0.406: U$4.SDA 21.42,80.88 22.95,79.36 31.96,79.36 U$5.SDA 32.12,79.36 32.12,90.82 MYSX.14
IO22
  Top 0.406: MYSX.13 32.27,93.42 32.27,92.65 33.49,91.43 33.49,78.13 32.12,76.76 U$5.SCL
  Bottom 0.406: U$5.SCL 31.96,76.76 22.95,76.76 18.82,80.88 U$4.SCL
IO26
  Bottom 0.406: WAVESHARE.5 41.9,78.28 38.08,78.28 25.54,90.82 24.63,90.82 MYSX.20 24.63,90.67 17.14,83.18 12.71,83.18 12.25,82.72 3.69,82.72 HELTEK.CS
IO27
  Top 0.406: 39.91,75.53 39.91,75.08 41.9,73.09 WAVESHARE.3 | 39.91,75.53 39.91,90.82 MYSX.8 | HELTEK.D/C 3.69,77.52 29.52,77.52 31.5,75.53 39.76,75.53 39.91,75.53
MISO1  (via drill 0.3 pad 0.61)  (1 unrouted)
  Top 0.305: v31.18,23.31 31.36,23.5 35.84,23.5 CC2.MISO | CC3-EXT.MISO 56.97,30.11 56.97,30.23 56.01,31.19 42.65,31.19 41.58,30.11 41.58,29.98 CC2-EXT.MISO | v61.24,26.19 CC3.MISO 61.24,23.5 62.67,22.07 84.59,22.07 86.01,23.5 CC1.MISO
  Bottom 0.305: CC2-EXT.MISO 40.51,36.82 34.23,43.11 U$1.27 34.23,51.23 18.54,51.23 17.91,50.6 17.91,46.82 27.67,37.06 27.67,32.48 31.37,28.79 31.37,23.5 v31.18,23.31 31.18,22.66 28.39,19.87 CC0.MISO | CC3-EXT.MISO 58.03,29.05 58.17,29.05 59.1,28.11 59.1,27.52 60.44,26.19 v61.24,26.19 | v61.24,26.19
MISO2
  Bottom 0.305: U$1.18 44.39,36.01 44.14,36.01 38.04,42.12 38.04,50.42 36.51,51.94 IC2.7
MOSI1  (via drill 0.3 pad 0.61)  (1 unrouted)
  Top 0.305: CC1.MOSI 90.01,26.04 81.47,26.04 80.72,25.29 80.72,23.65 80.11,23.04 66.52,23.04 65.25,24.32 CC3.MOSI 65.25,25.4 65.25,26.04 65.02,26.04 v64.84,26.21 | v27.93,22.42 28.22,22.14 38.49,22.14 39.84,23.5 CC2.MOSI 39.84,26.04 40.64,26.04 41.62,27.02 41.62,27.59 42.94,28.91 43.05,28.91 CC2-EXT.MOSI 44.12,29.98 44.12,29.87 45.1,28.89 58.41,28.89 59.51,29.98 59.51,30.11 CC3-EXT.MOSI
  Bottom 0.305: CC2-EXT.MOSI 43.05,36.05 36.77,42.33 U$1.26 | v27.93,22.42 27.27,23.09 25.95,23.09 25.56,22.7 CC0.MOSI | CC3-EXT.MOSI 60.58,29.05 60.71,29.05 61.64,28.11 61.64,27.51 62.94,26.21 v64.84,26.21
N$1
  Top 0.61: 48.13,20.2 46.51,21.83 45.35,21.83 43.84,23.34 CC2.VCC | VTRX2.2 48.13,20.2 | 48.13,20.2 89.53,20.2 93.04,23.71 93.04,26.07 C3.2
N$3  (via drill 0.3 pad 0.61)
  Top 0.61: CC3.VCC 69.25,26.06 69.28,26.1 C4.2 69.28,28.51 v69.09,28.51
  Bottom 0.61: VTRX3.2 67.82,29.39 68.22,29.39 v69.09,28.51
RESET  (via drill 0.3 pad 0.61)
  Top 0.254: FLASH.2 73.49,92.69 73.7,92.9 76.59,92.9 78.03,94.34 84.4,94.34 85.25,93.5 85.25,93.15 86.17,92.23 87.66,92.23 B1.22 92,87.89 v97.07,87.89
  Bottom 0.254: v97.07,87.89 97.85,87.89 99,86.75 99,76.42 97.6,75.02 SV2.7
RS
  Bottom 0.254: OPT3.2 55.41,81.84 55.46,81.89 U$6.RS
RST
  Top 0.305: U$1.17 41.85,32.35 41.39,31.89 20.91,31.89 17.15,28.14 10.72,28.14 7.75,31.11 IC2.3
RX0  (via drill 0.3 pad 0.61)
  Top 0.254: v77.14,71.66 77.87,70.93 86.12,70.93 86.94,70.11 92.69,70.11 94.04,71.47 SV2.6
  Bottom 0.254: 77.11,77.73 64.9,77.73 64.55,78.08 U$6.RXD | B1.2 77.29,89.9 77.29,77.92 77.11,77.73 | 77.11,77.73 77.11,71.69 v77.14,71.66
RX1
  Top 0.305: UART1.3 58.23,39.37 62.74,34.85 72.03,34.85 72.28,35.11 84.71,35.11 85.69,36.09 HMMOD-UART.5
  Bottom 0.305: U$1.22 46.93,47.61 51.51,43.02 51.51,39.37 UART1.3
RX-MAPLE
  Top 0.305: U$1.30 26.61,47.61 47.4,47.61 48.2,48.41 48.2,50.46 48.99,51.25 49.9,51.25 51.51,49.64 51.51,49.53 UART0.3
RX_DBG  (via drill 0.3 pad 0.61)
  Top 0.305: WLAN.TX 59.27,40.49 50.46,40.49 48.09,38.12 34.9,38.12 v34.58,37.79 | DBG.4 95.07,48.26 v92.03,45.22
  Bottom 0.305: WLAN.TX 64.44,37.23 72.35,37.23 80.34,45.22 v92.03,45.22 | U$1.14 34.23,36.01 34.58,36.36 v34.58,37.79
SCK1  (via drill 0.3 pad 0.61)  (1 unrouted)
  Top 0.305: 60.22,23.85 62.47,21.59 86.11,21.59 88.01,23.5 CC1.SCLK | v29.49,22.76 29.55,22.7 37.05,22.7 37.84,23.5 CC2.SCLK 37.94,24.86 v38.81,24.86 | CC3.SCLK 63.24,26.04 62.53,26.04 61.48,27.08 60.58,27.08 | 60.58,27.08 60.58,26.51 60.22,26.15 60.22,23.85 | CC3-EXT.SCK 60.58,27.08 | 60.22,23.85 59.24,22.88 46.31,22.88 45.2,23.98 45.2,25.29 44.12,26.37 43.05,26.37 CC2-EXT.SCK
  Bottom 0.305: CC0.SCLK 26.98,21.28 27.48,21.79 28.52,21.79 v29.49,22.76 | 40.26,28.71 40.82,28.71 41.98,27.55 41.98,27.44 CC2-EXT.SCK | 40.26,28.71 39.44,29.53 39.44,31.07 37.88,32.63 37.88,36.24 29.44,44.67 29.44,45.47 31.58,47.61 31.69,47.61 U$1.28 | 40.26,28.71 39.24,27.69 39.24,25.28 v38.81,24.86
SCK2
  Top 0.305: U$1.19 45.1,36.01 41.35,36.01 40.58,35.24 40.58,33.16 39.76,32.35 20.68,32.35 16.92,28.59 12.78,28.59 10.29,31.08 IC2.4
TX1
  Top 0.305: UART1.2 60.08,36.83 62.52,34.4 72.21,34.4 72.47,34.65 86.26,34.65 87.69,36.09 HMMOD-UART.6
  Bottom 0.305: U$1.23 44.39,47.61 45.37,47.61 49.87,43.11 49.87,38.48 51.51,36.83 UART1.2
TX2  (via drill 0.3 pad 0.61)
  Top 0.254: v76.73,79.71 79.52,76.92 88.27,76.92 90.07,75.12 91.4,75.12 93.71,72.81 95.24,72.81 96.58,71.47 SV2.5
  Bottom 0.254: 74.36,87.82 75.98,87.82 76.75,87.05 76.75,79.73 v76.73,79.71 | 74.36,87.82 68.44,81.89 64.55,81.89 U$6.TXD | B1.1 74.36,92.97 74.36,87.82
TX-MAPLE
  Top 0.305: U$1.31 26.5,46.99 UART0.2
TX_DBG  (via drill 0.3 pad 0.61)
  Top 0.305: DBG.3 95.96,45.72 95.91,45.66 v94.87,45.66 | v60.07,32.04 49.28,32.04 48.2,33.12 48.2,35.18 46.91,36.48 37.23,36.48 36.77,36.01 U$1.15
  Bottom 0.305: v60.07,32.04 60.74,31.36 63.69,31.36 64.03,31.7 64.03,32.95 62.52,34.46 62.52,36.72 63.65,37.85 69.19,37.85 70.15,38.81 WLAN.RX 72.06,38.81 79.11,45.85 94.68,45.85 v94.87,45.66
UIN  (via drill 0.3 pad 0.61)
  Top 0.508: v70.07,84.45 71.05,83.47 IC5.3
  Bottom 0.508: 80.29,92.18 81.17,91.29 81.44,91.29 STEPDWN.3 81.44,89.58 81.44,89.01 78.48,86.04 78.48,70.87 78.66,70.69 IC3.3 78.47,69.51 IC4.3 | 80.29,92.18 80.29,93.79 81.99,95.49 91.36,95.49 92.22,94.62 92.22,94.61 C14.1 | 80.29,92.18 77.97,92.18 76.88,93.28 76.88,94.72 76.11,95.49 73.47,95.49 72.55,94.57 | v70.07,84.45 68.64,85.88 68.64,91.06 67.98,91.72 67.98,92.29 68.1,92.42 68.1,92.48 | 68.1,92.48 68.53,92.91 70.01,92.91 F2.1 71.29,94.09 71.77,94.57 72.55,94.57 | 68.1,92.48 68.02,92.56 REG_BRIDGE.1 | RAW1.2 72.55,94.57
UREG1  (via drill 0.3 pad 0.61)
  Top 0.508: v68.28,94.64 69.51,95.88 89.09,95.88 B1.24 94.45,90.52 97.95,90.52 98.8,89.67 98.8,68.5 97.82,67.53 97.6,67.53 SV2.1
  Bottom 0.508: REG_BRIDGE.2 68.02,94.09 68.02,94.38 v68.28,94.64
VCC  (via drill 0.3 pad 0.61)  (2 unrouted)
  Top 0.61: C12.1 71.91,33.02 72.75,33.86 79.64,33.86 80.01,33.49 80.01,28.79 | C5.+ 75.69,28.07 75.69,28.4 C7.2 80.01,28.4 80.01,28.79 | CC1.VCC 94.88,25.63 94.88,27.74 93.82,28.79 80.01,28.79 | 14.8,41.88 15.11,42.2 28.17,42.2 30.52,44.55 51.26,44.55 51.36,44.45 UART0.1 62.03,44.45 67.45,39.02 67.45,38.34 68.25,37.54 69.83,37.54 WLAN.VCC | U$1.1 3.37,36.34 9.26,36.34 14.8,41.88 | 5.02,48.15 5.82,47.35 9.33,47.35 14.8,41.88 | 5.02,48.15 5.02,51.75 IC2.11 IC2.10 7.75,54.66 7.04,54.66 6.67,55.04 C6.1 | U$1.40 3.22,47.41 4.27,47.41 5.02,48.15 | DBG.2 95.81,43.18 95.56,43.43 v94.75,43.43 | VTRX2.1 v47.12,20.14 | C2.2 47.12,25.15 46.66,25.15 45.59,26.22 CC2-EXT.VCC@1 | CC3-EXT.VCC@0 61.9,30.11 61.9,31.33 58.94,34.29 UART1.1
  Bottom 0.61: 66.8,30.75 64.97,30.75 64.33,30.11 CC3-EXT.VCC@0 63.12,28.79 CC3-EXT.VCC@1 | VTRX3.1 66.8,30.75 | 66.8,30.75 66.8,30.81 66.8,31.57 70.33,31.57 | 70.33,31.57 70.33,31.4 C5.+ | 70.33,31.57 70.33,35.49 WLAN.VCC 71.31,36.48 75.82,36.48 HMMOD-UART.1 77.69,39.47 90.79,39.47 v94.75,43.43 | v47.12,20.14 47.12,24.69 45.59,26.22 CC2-EXT.VCC@1 CC2-EXT.VCC@0 49.03,29.98 UART1.1 | 21.93,26.33 22.7,26.33 C1.2 | 21.93,26.33 21.62,26.64 | CC0.VCC 21.93,26.33 | U$1.1 1.21,29.8 4.37,26.64 21.62,26.64 | 21.62,26.64
VCC1
  Top 0.305: 46.13,89.87 46.13,92.87
  Top 0.61: U$5.VIN 32.12,71.56 38.38,71.56 41.9,68.04 WAVESHARE.1 46,72 46,90 arc90 46.13,89.87 | 46.13,92.87 arc90 45.52,93.48 MYSX.3
  Bottom 0.61: HELTEK.VCC 3.69,72.63 7.05,72.63 C10.1 7.36,72.48 13.62,78.74 | 13.62,78.74 13.62,80.88 U$4.VIN | U$5.VIN 31.96,71.71 20.65,71.71 13.78,78.59 13.62,78.74
VCC2
  Top 0.508: SV1.2 65.56,67.42 65.34,67.42 64.42,66.49 64.42,65.55 65.7,64.27 94.56,64.27 96.34,66.05 96.34,67.67 SV2.3 | B1.21 87.66,89.69 87.66,90.15 STEPDWN.1 85.38,90.15 85.38,90.37 84.46,91.29 80.96,91.29 80.04,90.37 80.04,90.15 STEPDWN.4
  Bottom 0.508: R1.1 R3.1 63.02,84.99 62.64,84.61 62.64,79.36 | IC4.2 81.19,67.23 83.37,65.05 84.63,65.05 IC4.TAB IC3.4 87.58,67.23 | 65.56,73.09 64.7,73.95 64.16,73.95 R2.1 63.02,74.99 62.64,75.37 62.64,79.36 | C11.2 65.7,79.04 65.39,79.36 U$6.VDD 62.64,79.36 | 87.58,67.23 87.58,83.33 B1.21 | 65.56,73.09 65.89,73.42 C13.1 | SV1.2 65.56,73.09 | 87.58,67.23 89.32,67.23 89.32,65.84 90.25,64.9 95.2,64.9 96.46,66.16 96.46,66.86 97.38,67.78 97.6,67.78 SV2.3
VIN
  Top 0.61: U$3.TIP 91.58,32.16 95.65,28.08 95.65,24.31 89.3,17.96 31.32,17.96 25.96,23.32 21.95,23.32 20.39,21.76 20.39,21.21 F1.P$2 17.45,21.21 17.42,21.18 U$2.TIP
VIN2  (via drill 0.3 pad 0.61)
  Top 0.61: IC1.4 28.04,14.22 28.14,14.33 v32.64,14.33 | U$1.21 50.63,48.26 87.89,48.26 95.51,40.64 DBG.1 | 20.13,14.22 IC1.4 | IC6.2 20.13,14.22 | 20.13,14.22 20.13,10.57 18.96,9.4 NO_REGULATOR.1 | IC6.TAB IC1.4
  Bottom 0.61: U$1.21 47.45,51.44 43.89,51.44 43.17,50.72 43.17,41.04 45.65,38.56 45.65,32.73 44.27,31.35 44.27,25.96 v32.64,14.33
WIZ_CS
  Top 0.305: U$1.20 49.47,36.01 48.54,36.93 36.1,36.93 35.57,36.4 21.47,36.4 20.26,35.19 20.26,33.15 16.16,29.06 14.91,29.06 12.83,31.14 IC2.5
WIZ_RST  (via drill 0.3 pad 0.61)
  Top 0.305: v30.05,45.15 18.44,45.15 15.34,48.26 15.34,50.24 13.64,51.94 IC2.8
  Bottom 0.305: U$1.16 39.31,36.01 39.19,36.01 v30.05,45.15

## Text on the board
tNames: VCC | Reset | 3V3 | GND | A5 | A4 | GND | D7 | D9 | VIN | GND | SS | SCK | 15 | VIN | B | MISO | MOSI | A | 3V3 | A2 | A3 | 14 | A | Regulator1117 | A1 | D8 | 26 | B | C1 | D6 | D5 | 0,1uF | 13 | GND | D3 | D2 | VIN | IO27 | A0 | GND | GND | RST | GND | VCC | MOSI | GND | RX | TX | B | VCC | A | GND | VCC | MysX Display AddOn V0.1 | 3V3 | UREG | MISO | SCK | RST | MAPLE CUN / - large - | GND | CS | VCC | GND | T | GND | R | R | VCC | T | + | GND | VIN | TX | TX | RX | RX | 31 | VCC | LAN | CC3 | Ant0 | Ant2 | Ant3 | Ant1
bNames: Fuse | C6 | Jp3 | A4 | 3V3 | GND | A5 | Jp1 | 0,1uF | mysX | VIN | Reg | RAW1 | GND | VCC | UREG | GND | VCC | ProMicro easySens V0.2CAN | R3 | R4 | VIN | 4K7 | GND | IO15 | 4k7 | 10K | VCC | B | R1 | 14 | OPT3 | 26 | A | 22p | StepDWN / Vendor: / OSKJ, ... | 10K | 13 | B | C3 | VIN | 27 | GND | GND | 10K | 10uF | C4 | 1117 DPAC or SOT223 | VCC | R6 | R2 | RegExtern | GND | VCC | B | opt_120R | A | 3v3 | (C) www.neuby.de | Socket CC1101 / Transc. 2+3 | Version 3.3 / www.neuby.de | MAPLE CUN | Ant0 | Ant2 | Ant3 | Ant1
tValues: 0,1uF | C6 | R3 | R1 | Fuse | JP-Fuse | 4K7 | RJ45 Connector | 22p | C3 | OPT3 | 0,1uF | C4 | Opt.120R